# EAGLE board Main Board 2d PCB 2 v38 (EAGLE 9.7.0)
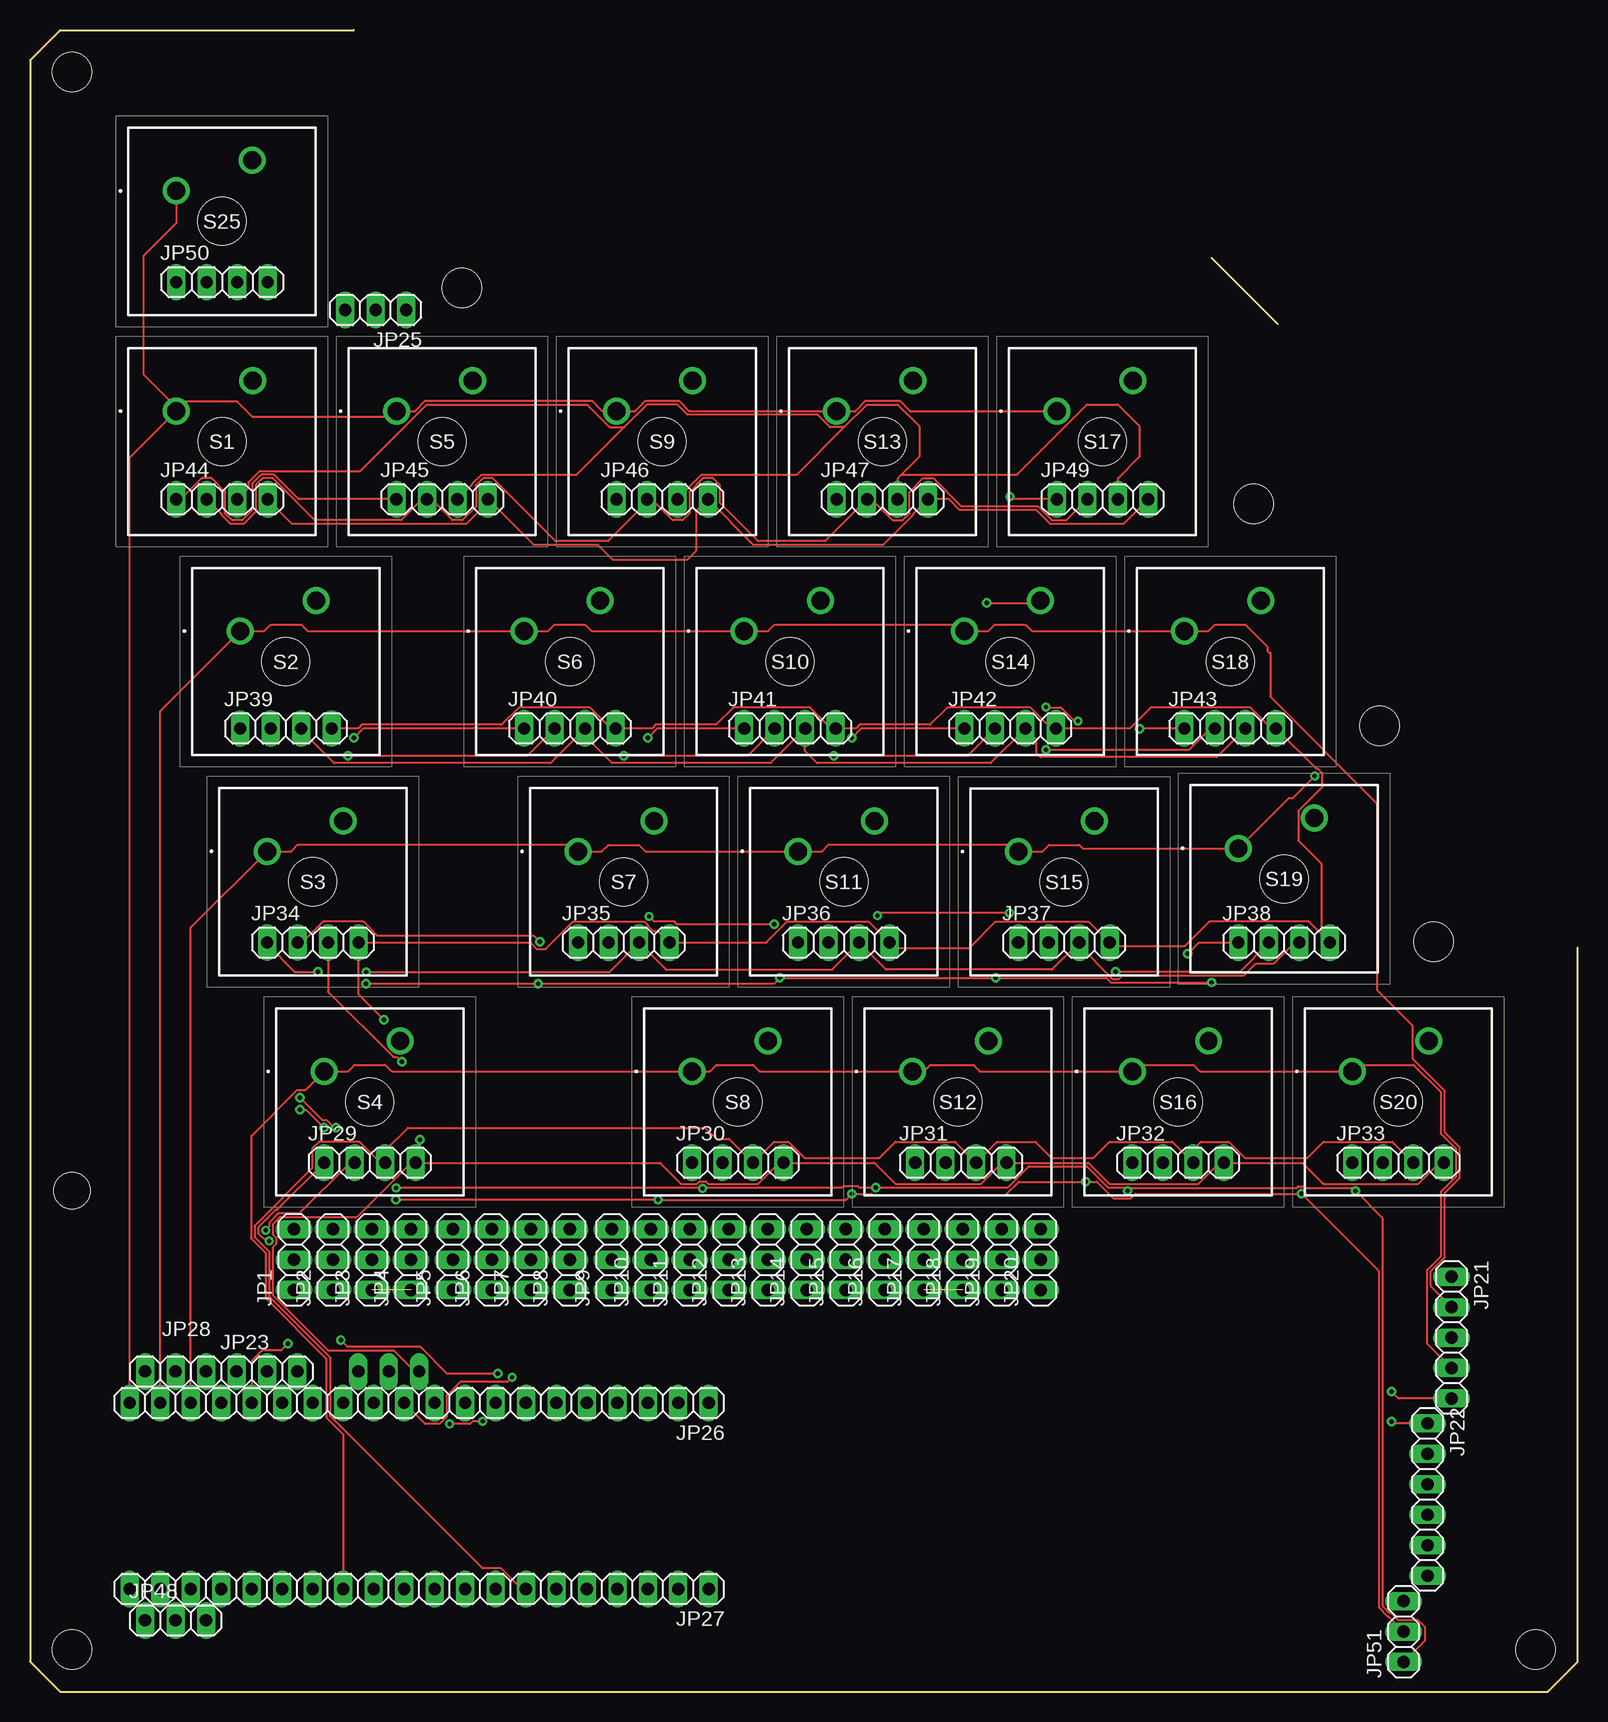
[diagram p0: board, top side]
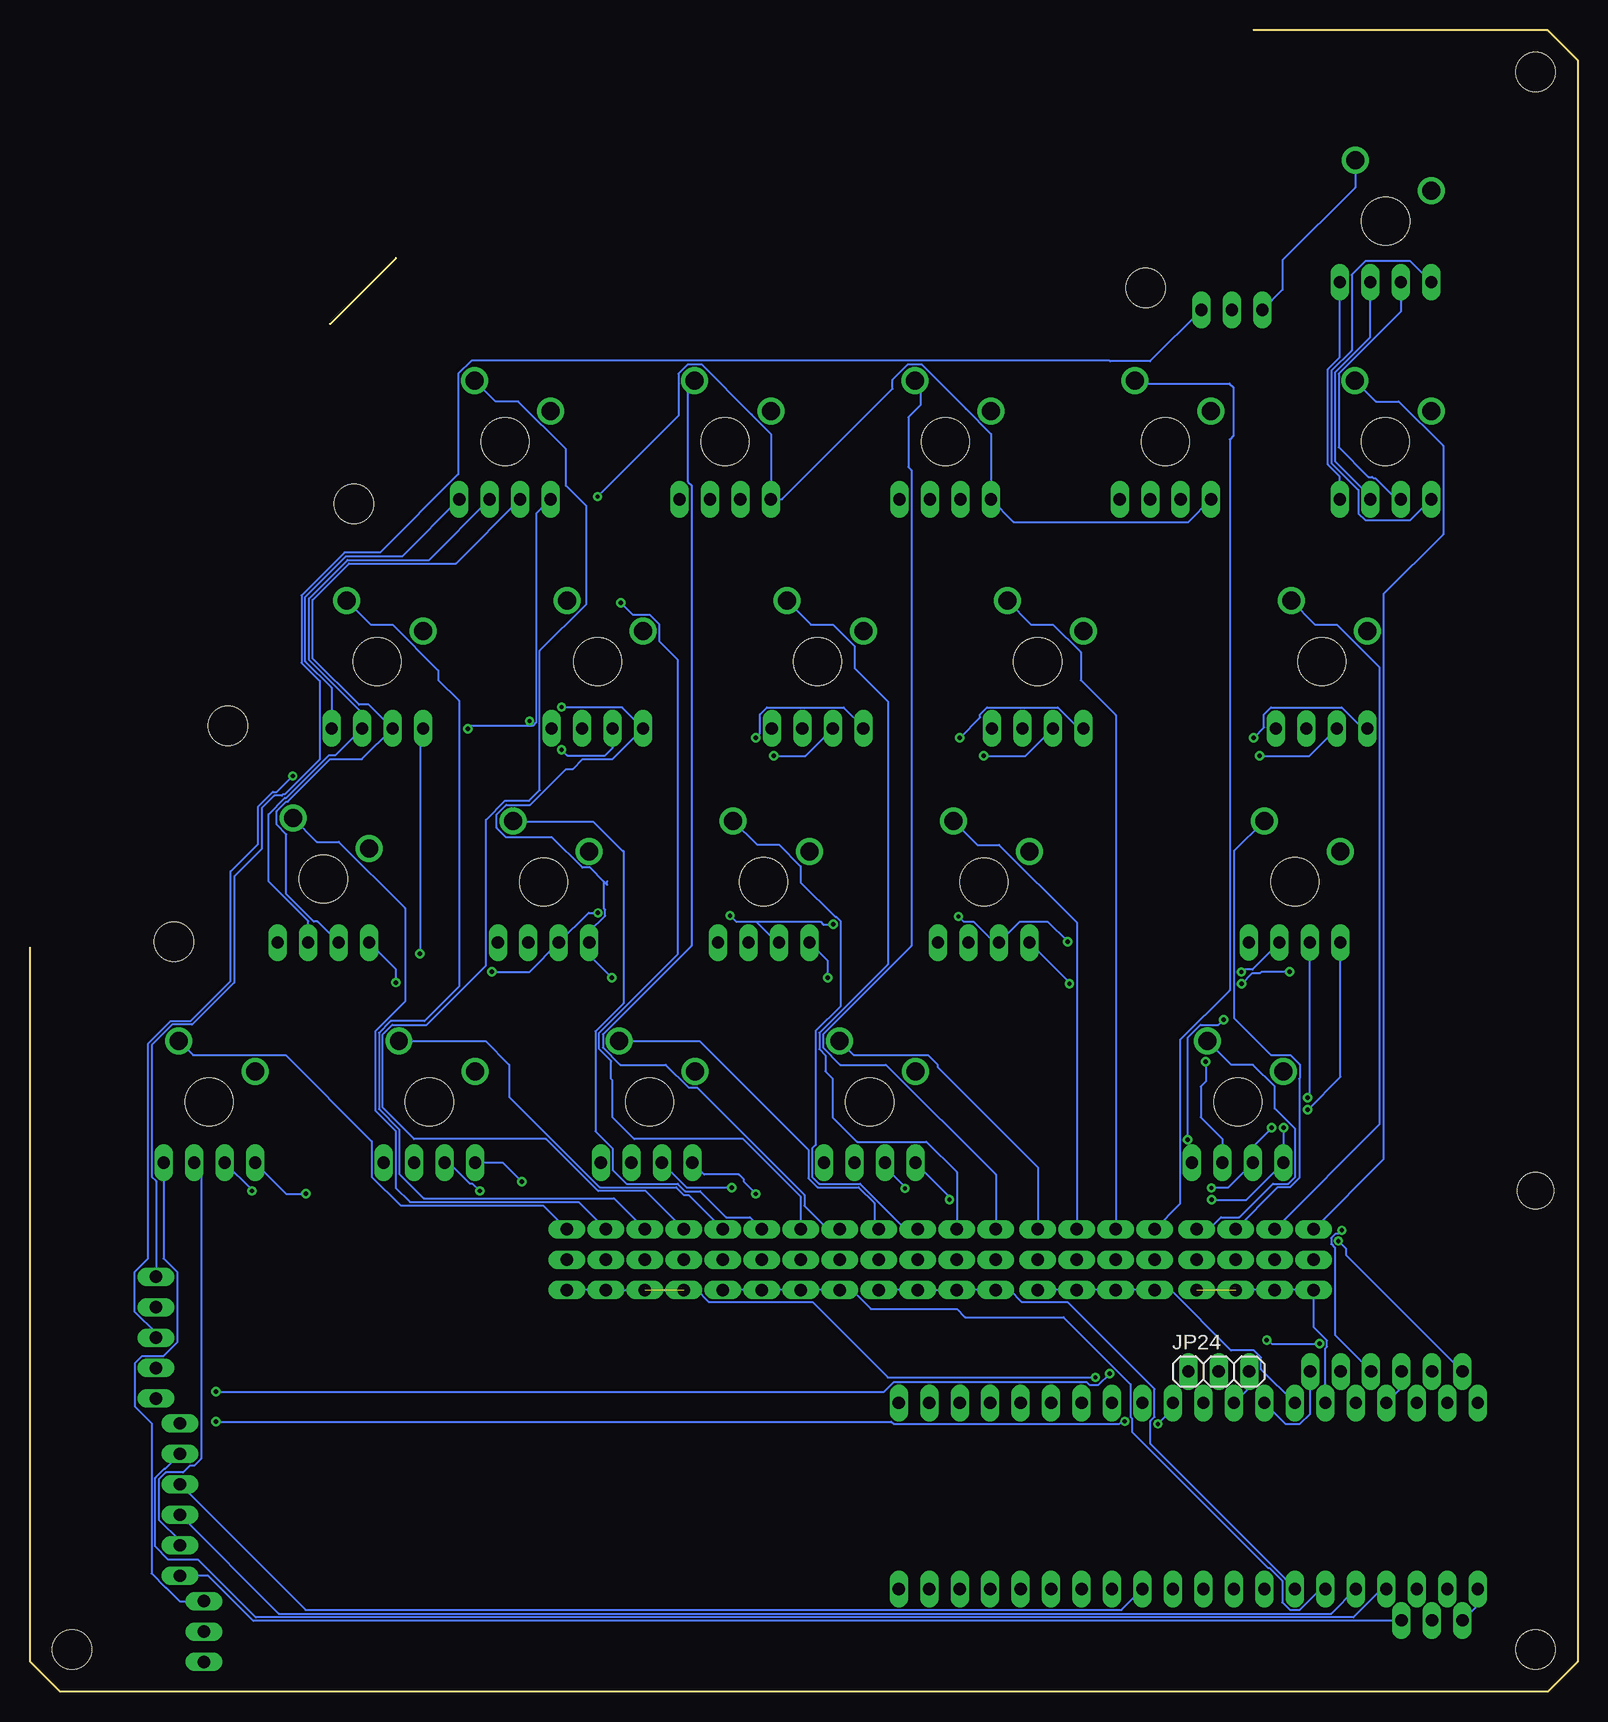
[diagram p1: board, bottom side, seen from below]

Size 129 x 138.5 mm. Coordinates in mm from the lower left corner, seen from the top.
Outline: 27,138.5 2.5,138.5 0,136 0,2.5 2.5,0 126.5,0 129,2.5 129,62
Outline: 98.5,119.5 104,114
Copper layers (1*16): Top / Bottom
Stack-up Default Layer Stack: Top User Defined 0.035mm / Dielectric-1 User Defined 1.5mm / Bottom User Defined 0.035mm
Design rules "default": minimum track width 6mil, minimum drill 0.35mm, track to track 6mil, track to pad 6mil, pad to pad 6mil, via to via 6mil, smd to smd 6mil, copper to edge 40mil, drill to drill 6mil, minimum pad ring 10mil, minimum via ring 8mil, stop-mask expansion 4mil, vias tented up to drill 0mil, thermal gap 10mil
Holes 3.25 mm at 3.5,135 3.5,3.5 125.5,3.5 117,62.5 112.5,80.5 102,99 36,117
Holes 3 mm at 3.5,41.75

## Footprints (pad centres in the part's own frame; a part is rotated, then mirrored left to right if it is on the bottom)
1X03 = drill 1.016 long: 1 -2.54,0; 2 0,0; 3 2.54,0
1X05 = drill 1.016 long: 1 -5.08,0; 2 -2.54,0; 3 0,0; 4 2.54,0; 5 5.08,0
1X06 = drill 1.016 long: 1 -6.35,0; 2 -3.81,0; 3 -1.27,0; 4 1.27,0; 5 3.81,0; 6 6.35,0
1X20 = drill 1.016 long: 1 -24.13,0; 2 -21.59,0; 3 -19.05,0; 4 -16.51,0; 5 -13.97,0; 6 -11.43,0; 7 -8.89,0; 8 -6.35,0; 9 -3.81,0; 10 -1.27,0; 11 1.27,0; 12 3.81,0; 13 6.35,0; 14 8.89,0; 15 11.43,0; 16 13.97,0; 17 16.51,0; 18 19.05,0; 19 21.59,0; 20 24.13,0
1X04 = drill 1.016 long: 1 -3.81,0; 2 -1.27,0; 3 1.27,0; 4 3.81,0
MX1AE1NW = drill 1.499 pad 2.248: 1 0,0; 2 6.35,2.54 | hole 3.988: 3.81,-2.54

## Placement (x,y rotation side)
JP1  PINHD-1X3  [1X03]  22,36 90 top
JP2  PINHD-1X3  [1X03]  25.25,36 90 top
JP3  PINHD-1X3  [1X03]  28.5,36 90 top
JP4  PINHD-1X3  [1X03]  31.75,36 90 top
JP5  PINHD-1X3  [1X03]  35.25,36 90 top
JP6  PINHD-1X3  [1X03]  38.5,36 90 top
JP7  PINHD-1X3  [1X03]  41.75,36 90 top
JP8  PINHD-1X3  [1X03]  45,36 90 top
JP9  PINHD-1X3  [1X03]  48.5,36 90 top
JP10  PINHD-1X3  [1X03]  51.75,36 90 top
JP11  PINHD-1X3  [1X03]  55,36 90 top
JP12  PINHD-1X3  [1X03]  58.25,36 90 top
JP13  PINHD-1X3  [1X03]  61.5,36 90 top
JP14  PINHD-1X3  [1X03]  64.75,36 90 top
JP15  PINHD-1X3  [1X03]  68,36 90 top
JP16  PINHD-1X3  [1X03]  71.25,36 90 top
JP17  PINHD-1X3  [1X03]  74.5,36 90 top
JP18  PINHD-1X3  [1X03]  77.75,36 90 top
JP19  PINHD-1X3  [1X03]  81,36 90 top
JP20  PINHD-1X3  [1X03]  84.25,36 90 top
JP21  PINHD-1X5  [1X05]  118.5,29.5 270 top
JP22  PINHD-1X6  [1X06]  116.5,16 270 top
JP23  PINHD-1X3  [1X03]  19.75,26.67 0 top
JP24  PINHD-1X3  [1X03]  29.91,26.67 0 bottom
JP25  PINHD-1X3  [1X03]  28.81,115.16 180 top
JP26  PINHD-1X20  [1X20]  32.45,24.05 180 top
JP27  PINHD-1X20  [1X20]  32.45,8.55 180 top
JP28  PINHD-1X3  [1X03]  12.13,26.67 0 top
JP29  PINHD-1X4  [1X04]  28.32,44.08 0 top
JP30  PINHD-1X4  [1X04]  59,44.08 0 top
JP31  PINHD-1X4  [1X04]  77.6,44.08 0 top
JP32  PINHD-1X4  [1X04]  95.7,44.08 0 top
JP33  PINHD-1X4  [1X04]  114.05,44.08 0 top
JP34  PINHD-1X4  [1X04]  23.58,62.43 0 top
JP35  PINHD-1X4  [1X04]  49.49,62.42 0 top
JP36  PINHD-1X4  [1X04]  67.84,62.42 0 top
JP37  PINHD-1X4  [1X04]  86.19,62.42 0 top
JP38  PINHD-1X4  [1X04]  104.54,62.42 0 top
JP39  PINHD-1X4  [1X04]  21.33,80.28 0 top
JP40  PINHD-1X4  [1X04]  45,80.28 0 top
JP41  PINHD-1X4  [1X04]  63.35,80.28 0 top
JP42  PINHD-1X4  [1X04]  81.7,80.28 0 top
JP43  PINHD-1X4  [1X04]  100.05,80.28 0 top
JP44  PINHD-1X4  [1X04]  16.01,99.38 0 top
JP45  PINHD-1X4  [1X04]  34.36,99.38 0 top
JP46  PINHD-1X4  [1X04]  52.7,99.38 0 top
JP47  PINHD-1X4  [1X04]  71.06,99.38 0 top
JP48  PINHD-1X3  [1X03]  12.13,5.92 0 top
JP49  PINHD-1X4  [1X04]  89.41,99.38 0 top
JP50  PINHD-1X4  [1X04]  16.01,117.48 0 top
JP51  PINHD-1X3  [1X03]  114.5,5 90 top
S1  MX1A-E1NW  [MX1AE1NW]  12.2,106.74 0 top
S2  MX1A-E1NW  [MX1AE1NW]  17.52,88.38 0 top
S3  MX1A-E1NW  [MX1AE1NW]  19.77,70.04 0 top
S4  MX1A-E1NW  [MX1AE1NW]  24.52,51.69 0 top
S5  MX1A-E1NW  [MX1AE1NW]  30.55,106.74 0 top
S6  MX1A-E1NW  [MX1AE1NW]  41.19,88.39 0 top
S7  MX1A-E1NW  [MX1AE1NW]  45.68,70.03 0 top
S8  MX1A-E1NW  [MX1AE1NW]  55.19,51.69 0 top
S9  MX1A-E1NW  [MX1AE1NW]  48.89,106.74 0 top
S10  MX1A-E1NW  [MX1AE1NW]  59.54,88.39 0 top
S11  MX1A-E1NW  [MX1AE1NW]  64.03,70.04 0 top
S12  MX1A-E1NW  [MX1AE1NW]  73.54,51.69 0 top
S13  MX1A-E1NW  [MX1AE1NW]  67.24,106.74 0 top
S14  MX1A-E1NW  [MX1AE1NW]  77.89,88.38 0 top
S15  MX1A-E1NW  [MX1AE1NW]  82.39,70.02 0 top
S16  MX1A-E1NW  [MX1AE1NW]  91.9,51.69 0 top
S17  MX1A-E1NW  [MX1AE1NW]  85.59,106.74 0 top
S18  MX1A-E1NW  [MX1AE1NW]  96.24,88.38 0 top
S19  MX1A-E1NW  [MX1AE1NW]  100.73,70.28 0 top
S20  MX1A-E1NW  [MX1AE1NW]  110.25,51.7 0 top
S25  MX1A-E1NW  [MX1AE1NW]  12.19,125.09 0 top

## Library data of the parts
JP1-JP51 = Connector; CATEGORY: CONNECTOR; SUB-CATEGORY: PIN-HEADER
S1-S20 S25 = SamacSys_Parts; DESCRIPTION: Pushbutton Switches Full Travel, Mech. Keyswitch, Click Tactile Feel (Blue stem), 60cN, No LED, No Diode, Fixation Pins for PCB Mounting; HEIGHT: 15.2mm; MANUFACTURER_NAME: Cherry; MANUFACTURER_PART_NUMBER: MX1A-E1NW; MOUSER_PART_NUMBER: 540-MX1A-E1NW; MOUSER_PRICE-STOCK: https://www.mouser.co.uk/ProductDetail/CHERRY/MX1A-E1NW/?qs=Z7NFYKyvgJd45Wm4xzFv7w%3D%3D

## Nets
N$1: JP1.3 S1.2
N$2: JP2.3 S2.2
N$3: JP3.3 S3.2
N$4: JP4.3 S4.2
N$5: JP5.3 S5.2
N$6: JP6.3 S6.2
N$7: JP7.3 S7.2
N$8: JP8.3 S8.2
N$9: JP9.3 S9.2
N$10: JP10.3 S10.2
N$11: JP11.3 S11.2
N$12: JP12.3 S12.2
N$13: JP13.3 S13.2
N$14: JP14.3 S14.2
N$15: JP15.3 S15.2
N$16: JP16.3 S16.2
N$17: JP17.3 S17.2
N$18: JP18.3 S18.2
N$19: JP19.3 S19.2
N$20: JP20.3 S20.2
N$21: JP21.1 JP25.1
N$22: JP21.5 JP26.16
N$23: JP22.1 JP26.10
N$24: JP22.6 JP48.3
N$25: JP25.3 S25.2
N$26: JP1.1 JP2.1 JP3.1 JP4.1 JP26.15
N$27: JP5.1 JP6.1 JP7.1 JP8.1 JP26.14
N$28: JP13.1 JP14.1 JP15.1 JP16.1 JP27.15
N$29: JP9.1 JP10.1 JP11.1 JP12.1 JP27.14
N$30: JP17.1 JP18.1 JP19.1 JP20.1 JP26.11
N$31: JP22.2 JP27.17
N$32: JP21.4 JP27.13 S4.1 S8.1 S12.1 S16.1 S20.1
N$33: JP21.3 JP26.18 S3.1 S7.1 S11.1 S15.1 S19.1
N$34: JP21.2 JP26.19 S2.1 S6.1 S10.1 S14.1 S18.1
N$35: JP26.20 S1.1 S5.1 S9.1 S13.1 S17.1 S25.1
N$36: JP22.4 JP27.16
N$37: JP22.3 JP27.9
N$38: JP28.1 JP29.1 JP30.1 JP31.1 JP32.1 JP33.1 JP34.1 JP35.1 JP36.1 JP37.1 JP38.1 JP39.1 JP40.1 JP41.1 JP42.1 JP43.1 JP44.1 JP45.1 JP46.1 JP47.1 JP49.1 JP50.1 JP51.2
N$39: JP26.17 JP28.3
N$40: JP27.20 JP48.1
N$41: JP23.3 JP26.13
N$42: JP24.3 JP26.12
N$43: JP22.5 JP27.7 JP29.3 JP30.3 JP31.3 JP32.3 JP33.3 JP34.3 JP35.3 JP36.3 JP37.3 JP38.3 JP39.3 JP40.3 JP41.3 JP42.3 JP43.3 JP44.3 JP45.3 JP46.3 JP47.3 JP49.3 JP50.3
N$46: JP24.1 JP29.4 JP30.4 JP31.4 JP32.4 JP33.4 JP34.4 JP35.4 JP36.4 JP37.4 JP38.4 JP39.4 JP40.4 JP41.4 JP42.4 JP43.4 JP44.4 JP45.4 JP46.4 JP47.4 JP49.4 JP50.4 JP51.3
N$51: JP23.1 JP29.2 JP30.2 JP31.2 JP32.2 JP33.2 JP34.2 JP35.2 JP36.2 JP37.2 JP38.2 JP39.2 JP40.2 JP41.2 JP42.2 JP43.2 JP44.2 JP45.2 JP46.2 JP47.2 JP49.2 JP50.2 JP51.1

## Tracks (layer width: path | path; a pad name or v marks a point on that pad's centre or on a via)
N$1
  Bottom 0.152: JP1.3 16.17,44.37 16.17,91.5 11.2,96.46 11.2,103.84 14.9,107.54 16.8,107.54 S1.2
N$2
  Bottom 0.152: JP2.3 16.53,47.26 16.53,85.41 20.05,88.93 21.88,88.93 S2.2
N$3
  Bottom 0.152: JP3.3 25.02,42.02 23.98,42.02 23.2,42.81 23.2,51.1 23.16,51.13 23.16,52.25 23.95,53.04 25.54,53.04 28.63,56.13 28.63,69.25 28.63,69.57 28.63,70.07 S3.2
N$4
  Bottom 0.152: S4.2 28.87,52.24 27.05,52.24 25.24,50.43 25.24,48.6 23.52,46.89 23.52,42.91 24.11,42.33 25.39,42.33 28.19,39.53 29.72,39.53 30.71,38.54 JP4.3
N$5
  Bottom 0.152: JP5.3 33.13,40.66 33.13,54.31 29,58.44 29,104.37 28.69,104.68 28.69,108.72 29,109.04 36.65,109.04 S5.2
N$6
  Bottom 0.152: JP6.3 38.5,81.39 41.41,84.3 41.41,86.63 43.72,88.94 45.55,88.94 S6.2
N$7
  Bottom 0.152: S7.2 50.04,70.58 48.21,70.58 41.75,64.12 JP7.3
N$8
  Bottom 0.152: JP8.3 45,43.7 53.34,52.04 53.34,52.25 54.13,53.04 60.35,53.04 S8.2
N$9
  Bottom 0.152: S9.2 54.79,108.83 54.79,107.23 55.79,106.23 55.79,102.06 55.52,101.8 55.52,62.16 62.89,54.79 62.89,53.67 61.46,52.24 57.65,52.24 48.5,43.09 JP9.3
N$10
  Bottom 0.152: JP10.3 51.75,43.3 54.28,45.83 60.05,45.83 62.09,47.87 62.09,51.09 62.7,51.7 62.7,53.04 63.2,53.54 63.2,54.92 57.5,60.61 57.5,82.54 60.26,85.3 60.26,87.13 62.07,88.94 63.9,88.94 S10.2
N$11
  Bottom 0.152: JP11.3 56.02,38.54 59.81,42.33 63.22,42.33 63.8,42.91 63.8,45.25 63.5,45.55 63.5,55.04 61.44,57.11 61.44,64.21 61.79,64.56 61.87,64.56 64.75,67.45 64.75,68.78 66.56,70.59 68.39,70.59 S11.2
N$12
  Bottom 0.152: S12.2 73.17,54.23 64.1,45.16 64.1,42.78 63.35,42.02 59.94,42.02 58.62,40.71 58.62,38.91 JP12.3
N$13
  Bottom 0.152: JP13.3 62.5,38.54 64.44,40.48 64.44,41.38 73.41,50.34 74.1,50.34 76,52.23 79.81,52.23 81.25,53.67 81.25,54.79 73.87,62.16 73.87,100.55 74.14,100.81 74.14,108.73 S13.2
N$14  (via drill 0.35)
  Top 0.152: v79.75,90.75 84.06,90.75 S14.2
  Bottom 0.152: JP14.3 64.75,41.25 69.56,46.06 78.63,46.06 80.44,47.87 80.44,50.94 80.55,51.05 80.55,52.54 81.55,53.54 81.55,54.91 75,61.47 75,86 76.54,87.54 76.54,88.94 77.33,89.74 78.74,89.74 v79.75,90.75
N$15
  Bottom 0.152: 79.54,70.08 79.54,70 | JP15.3 68.99,39.53 70.96,39.53 73.13,41.7 74.38,41.7 75.01,42.33 79.28,42.33 80.42,43.47 80.42,45.25 81.86,46.69 81.86,55.04 79.54,57.36 79.54,70 | 79.54,70 82.04,72.5 88.68,72.5 S15.2
N$16
  Bottom 0.152: S16.2 91.03,54.23 89.05,52.25 89.05,49.55 81.52,42.02 75.14,42.02 74.5,41.39 74.1,41.39 JP16.3
N$17
  Bottom 0.152: JP17.3 77.68,41.72 81.64,41.72 85.98,46.06 96.99,46.06 99.6,48.67 99.6,54.78 98.81,55.58 95.92,55.58 90.99,60.51 90.99,72.65 89.39,74.26 87.39,74.26 86.5,75.14 86.5,86.75 82.6,90.65 82.6,98.8 84.31,100.51 84.31,103.55 88.3,107.54 90.2,107.54 S17.2
N$18
  Bottom 0.152: S18.2 100.6,88.93 98.77,88.93 94.96,85.12 94.96,84.3 93.25,82.58 93.25,58.75 96.12,55.88 98.94,55.88 99.91,54.91 99.91,48.55 98.22,46.85 98.22,43.16 96.17,41.11 80.32,41.11 JP18.3
N$19
  Bottom 0.152: S19.2 105.09,70.83 103.26,70.83 97.74,65.31 97.74,57.51 100.21,55.04 100.21,48.42 98.52,46.73 98.52,41.99 97.33,40.81 83.27,40.81 JP19.3
N$20
  Bottom 0.152: S20.2 115.41,53.05 107.69,53.05 100.5,45.86 100.5,42.91 98.1,40.5 86.21,40.5 JP20.3
N$21
  Bottom 0.152: JP25.1 35.63,110.88 38.95,110.88 39.01,110.94 92.19,110.94 93.29,109.84 93.29,101.47 99.82,94.94 102.78,94.94 106.36,91.36 106.36,85.74 104.85,84.24 104.85,77.69 107.76,74.79 107.89,74.79 108,74.68 108.64,74.68 109.68,73.63 109.68,70.25 111.98,67.95 111.98,59.09 115.48,55.59 117.16,55.59 118.85,53.89 118.85,42.91 118.5,42.56 JP21.1
N$22  (via drill 0.35)
  Top 0.152: JP21.5 114.08,24.42 v113.5,25 | v39,26.5 34.79,26.5 32.56,28.73 26.47,28.73 v25.91,29.29 | v21.5,29 20.93,28.43 19.34,28.43 18.48,27.57 JP26.16
  Bottom 0.152: v113.5,25 57.79,25 56.99,25.8 40.93,25.8 40.7,25.57 39.93,25.57 v39,26.5 | v21.5,29 25.5,29 25.79,29.29 v25.91,29.29
N$23  (via drill 0.35)
  Top 0.152: JP22.1 113.65,22.35 v113.5,22.5 | v37.75,22.51 36.89,22.51 36.67,22.3 35.85,22.3 v34.99,22.3
  Bottom 0.152: v37.75,22.51 37.99,22.51 38.2,22.3 56.99,22.3 57.19,22.5 v113.5,22.5 | v34.99,22.3 33.72,23.57 JP26.10
N$24
  Bottom 0.152: JP22.6 114.15,9.65 110.38,5.88 14.67,5.88 JP48.3
N$25
  Bottom 0.152: S25.2 18.54,125.37 24.59,119.33 24.59,116.84 JP25.3
N$26  (1 unrouted)
  Bottom 0.152: JP4.1 JP2.1 JP1.1 22,30.36 20.89,29.25 20.89,28.75 21.02,28.62 JP26.15
N$27
  Bottom 0.152: JP26.14 26.38,26.87 26.38,27.85 26.96,28.43 28.88,28.43 33.91,33.46 JP5.1 JP6.1 JP7.1 JP8.1
N$28
  Top 0.152: JP13.1 62.21,33.46 62.25,33.5
  Bottom 0.152: JP27.15 21.4,8.55 23.15,6.8 23.97,6.8 24.61,7.44 24.61,9.22 25.69,10.3 25.8,10.3 37.14,21.64 37.14,22.77 37.25,22.88 37.25,25.61 42.84,31.2 51.05,31.2 51.73,31.88 58.91,31.88 60.48,33.46 JP13.1 JP14.1 JP15.1 JP16.1
N$29
  Bottom 0.152: 51.85,33.46 JP9.1 47.31,33.46 46.3,32.45 42.5,32.45 35.27,25.22 35.27,22.88 35.6,22.55 35.6,20.64 24.3,9.35 24.3,9.29 JP27.14 | 51.85,33.46 51.87,33.44 54.98,33.44 JP11.1 JP12.1 | 51.85,33.46 JP10.1
N$30  (via drill 0.35)  (1 unrouted)
  Top 0.152: JP26.11 32.93,22.3 34.13,22.3 34.71,22.88 34.71,24.66 35.85,25.8 39.8,25.8 v40.18,26.18
  Bottom 0.152: JP20.1 JP19.1 80.98,33.44 77.75,33.44 JP18.1 73.41,33.46 72.42,32.47 63.78,32.47 57.49,26.18 v40.18,26.18
N$31
  Bottom 0.152: JP27.17 16.32,8.55 18.68,6.19 110.19,6.19 115,11 117.47,11 118.56,12.08 118.56,17.81 117.8,18.56 117.75,18.56 JP22.2
N$32
  Top 0.152: JP27.13 26.1,21.46 24.7,22.86 24.7,27.74 19.64,32.8 19.64,36.55 18.42,37.76 18.42,46.28 22.25,50.11 22.93,50.11 S4.1 26.5,51.69 27.05,52.24 29.6,52.24 30.15,51.69 S8.1 56.68,51.69 57.22,52.24 60.28,52.24 60.83,51.69 S12.1 74.53,51.69 75.08,52.23 78.63,52.23 79.18,51.69 S16.1 92.39,51.69 92.93,52.23 96.99,52.23 97.52,51.7 S20.1 110.78,52.24 115.33,52.24 117.6,49.97 117.6,46.5 118.85,45.25 118.85,42.91 117.6,41.66 117.6,36.27 116.44,35.12 116.44,29.02 JP21.4
N$33  (via drill 0.35)
  Top 0.152: JP26.18 13.4,63.67 S3.1 21.76,70.04 22.3,70.59 45.13,70.59 S7.1 47.67,70.03 48.21,70.58 50.77,70.58 51.31,70.04 S11.1 66.02,70.04 66.56,70.59 81.82,70.59 S15.1 84.38,70.02 84.92,70.57 87.48,70.57 87.76,70.28 S19.1 104.94,74.5 105.28,74.5 v107.09,76.31
  Bottom 0.152: JP21.3 118.5,29.88 120.25,31.63 120.25,34.99 119.16,36.09 119.16,54.02 117.28,55.89 115.61,55.89 112.28,59.22 112.28,68.36 109.99,70.66 109.99,73.76 108.77,74.98 108.42,74.98 v107.09,76.31
N$34
  Top 0.152: JP26.19 10.86,81.72 S2.1 19.51,88.38 20.05,88.93 22.61,88.93 23.15,88.39 S6.1 43.18,88.39 43.72,88.94 46.28,88.94 46.82,88.39 S10.1 61.53,88.39 62.07,88.94 77.34,88.94 S14.1 79.88,88.38 80.42,88.93 82.98,88.93 83.52,88.38 S18.1 98.23,88.38 98.77,88.93 101.33,88.93 103.14,87.12 103.14,86.75 103.39,86.5 | JP21.2 116.75,33.79 116.75,34.99 117.91,36.15 117.91,41.53 119.16,42.78 119.16,45.38 117.91,46.63 117.91,50.1 115.24,52.76 115.24,55.5 112.28,58.46 112.28,74.02 103.39,82.92 103.39,86.5 | 103.39,86.62 103.39,86.5
N$35
  Top 0.152: JP26.20 8.32,102.86 S1.1 | S1.1 12.99,107.54 17.28,107.54 18.58,106.24 30.05,106.24 S5.1 32.1,106.74 32.95,107.59 46.84,107.59 47.69,106.74 S9.1 50.45,106.74 51.3,107.59 54.1,107.59 54.95,106.74 S13.1 68.8,106.74 69.64,107.59 72.52,107.59 73.37,106.74 S17.1 | S1.1 12.19,107.07 9.45,109.81 9.45,119.65 12.19,122.39 S25.1
N$36
  Bottom 0.152: JP27.16 20.54,6.49 108.26,6.49 JP22.4
N$37
  Bottom 0.152: JP27.9 38.01,6.8 106.03,6.8 JP22.3
N$38  (via drill 0.35)
  Top 0.152: v24.5,47 23,48.5 v22.5,48.5 | v30.5,41 v52.36,41 68,41 68,40.98 v68.5,41.48 70.16,41.48 70.26,41.38 81.31,41.38 82.42,42.5 v88,42.5 88.94,42.5 90.33,41.11 91.75,41.11 92.14,41.5 v106,41.5 112.44,35.06 112.44,7 113.2,6.25 113.25,6.25 JP51.2 | JP34.1 19.77,62.31 22.08,60 v24,60 | v28,59 v42.36,59 62,59 v62.5,59.5 v80.5,59.5 89.71,59.5 90.12,59.09 v98.5,59.09 | v96.5,61.5 97.42,62.42 JP38.1 | JP43.1 92.5,80.28 v92.5,80.25 | JP42.1 69.28,80.28 v68.5,79.5 | JP41.1 52.28,80.28 v51.5,79.5 | JP40.1 27.78,80.28 v27,79.5 | JP29.1 20.57,40.14 20.47,40.14 19.03,38.71 19.03,38.2 19.69,37.55 v19.93,37.55 | JP44.1 12.57,99.38 14.32,101.13 15.14,101.13 16.28,99.99 16.28,98.21 16.87,97.63 17.69,97.63 18.52,98.46 18.52,100.68 19.28,101.44 20.35,101.44 22.41,99.38 JP45.1 | JP49.1 85.56,99.41 81.87,99.41 v81.69,99.6 | v84.69,82.06 84.72,82.03 85.92,82.03 87.07,80.89 v87.36,80.89
  Bottom 0.152: JP28.1 19.3,36.39 19.3,36.92 v19.93,37.55 | v24.5,47 24.5,44.09 JP29.1 27.59,41 v30.5,41 | v22.5,48.5 19.77,51.23 JP34.1 | v68.5,41.48 69.5,42.48 69.5,42.7 69.9,43.1 72.81,43.1 JP31.1 | v88,42.5 89.58,44.08 JP32.1 | JP33.1 107.66,41.5 v106,41.5 | v28,59 27.13,59.87 26.48,59.87 26.35,60 v24,60 | v62.5,59.5 62.5,60.9 JP36.1 | v80.5,59.5 82.38,61.38 JP37.1 82.38,63.34 81.06,64.66 81.06,65.16 81.13,65.24 81.13,67.5 | JP38.1 98.5,60.2 v98.5,59.09 | 80.88,67.52 80.88,67.25 81.13,67.5 | JP43.1 96.5,80.02 v96.5,61.5 | v92.5,80.25 92.25,80.5 87.36,80.5 | 87.36,80.5 87.11,80.5 86.81,80.8 86.81,98.17 JP49.1 | JP41.1 59.54,80.4 61.17,82.03 67.57,82.03 68.15,81.45 68.15,79.85 v68.5,79.5 | JP40.1 41.57,80.28 43.32,82.03 49.22,82.03 49.8,81.45 49.8,81.2 v51.5,79.5 | v27,79.5 26.13,80.37 26.13,81.45 25.55,82.03 19.65,82.03 17.9,80.28 JP39.1 | JP35.1 42.36,59.1 v42.36,59 | JP30.1 52.36,41.25 v52.36,41 | JP50.1 13.95,119.23 17.69,119.23 18.82,118.09 18.82,111.78 20.51,110.09 20.51,102.41 18.27,100.17 18.27,98.21 17.69,97.63 13.95,97.63 JP44.1 | JP45.1 32.42,97.5 47.02,97.5 JP46.1 48.9,104.83 50.99,106.93 50.99,106.94 54.68,110.63 55.8,110.63 57.09,109.34 57.09,108.59 66.3,99.38 JP47.1 67.25,104.83 68.84,106.43 68.84,106.44 73.03,110.63 74.15,110.63 74.94,109.84 74.94,106.34 v81.69,99.6 | 81.13,67.5 82.3,68.67 82.95,68.67 85.49,71.21 89.3,71.21 90.09,72 90.09,73.12 89.3,73.91 87.3,73.91 84.32,76.89 83.75,76.89 82.92,77.72 80.45,77.72 JP42.1 79.64,82.03 84.67,82.03 v84.69,82.06 | v87.36,80.89 87.36,80.5
N$39
  Bottom 0.152: JP26.17 14.67,25.32 JP28.3
N$40
  Bottom 0.152: JP27.20 8.32,7.2 JP48.1
N$41
  Bottom 0.152: JP26.13 24.35,22.3 23.15,22.3 22.29,23.16 JP23.3
N$42
  Bottom 0.152: JP26.12 27.37,25.32 JP24.3
N$43  (via drill 0.35)
  Top 0.152: JP27.7 40.96,8.55 39.21,10.3 37.69,10.3 25,22.99 25,27.87 19.94,32.92 19.94,36.67 18.73,37.89 18.73,38.83 23.52,43.63 23.52,45.25 24.11,45.83 27.46,45.83 29.22,44.08 JP29.3 29.59,45.09 31.5,47 56.29,47 57.22,46.06 58.29,46.06 JP30.3 62.02,45.83 63.22,45.83 64.55,44.5 70.8,44.5 72.13,45.83 77.12,45.83 JP31.3 80.62,45.83 83.82,45.83 85.15,44.5 88.65,44.5 89.98,45.83 95.22,45.83 JP32.3 96.97,45.2 97.6,45.83 99.92,45.83 101.25,44.5 106.5,44.5 107.83,45.83 113.57,45.83 JP33.3 | v31,52.5 30.62,52.88 30.3,52.88 24.85,58.33 JP34.3 | JP39.3 22.6,80.15 25.36,77.39 43.38,77.39 JP40.3 46.27,79.5 46.43,79.5 48.53,77.39 61.73,77.39 JP41.3 64.62,78.38 65.61,77.39 80.08,77.39 JP42.3 83.89,79.36 83.89,78.25 84.25,77.89 98.93,77.89 JP43.3 | v28.02,59.98 48.31,59.98 JP35.3 53.01,60.17 66.86,60.17 JP36.3 71.36,60.17 85.21,60.17 JP37.3 87.46,62.18 90.25,59.39 90.75,59.39 91.05,59.7 101.2,59.7 102.18,60.67 103.68,60.67 105.43,62.42 JP38.3 | JP44.3 18.21,100.32 18.21,100.81 19.15,101.74 27.53,101.74 33.08,107.29 46.43,107.29 48.33,105.39 49.52,105.39 | JP45.3 36.87,100.62 36.87,100.68 37.63,101.44 45.57,101.44 49.52,105.39 | JP46.3 53.98,99.43 55.98,101.44 63.92,101.44 67.87,105.39 | 67.87,105.39 69.77,107.29 72.33,107.29 74.14,105.48 74.14,102.92 72.65,101.44 | JP49.3 90.67,101.11 92.49,102.92 92.49,105.48 90.68,107.29 88.12,107.29 82.27,101.44 72.65,101.44 | 49.52,105.39 51.42,107.29 53.98,107.29 54.83,106.44 65.63,106.44 66.68,105.39 67.87,105.39 | JP47.3 72.33,101.11 72.65,101.44
  Bottom 0.152: JP29.3 29.59,46.06 31.41,47.87 31.41,50.43 31,50.84 v31,52.5 | JP34.3 27.1,60.18 27.82,60.18 v28.02,59.98 | JP22.5 116.5,12.57 118.25,14.32 118.25,17.68 117.67,18.26 116.24,18.26 115.68,18.82 115.33,18.82 114.75,19.4 114.75,43.51 JP33.3 | JP49.3 95.72,94.33 102.53,94.33 105.75,91.11 105.75,86 101.32,81.57 JP43.3 103.57,78.03 104.09,78.03 107.63,74.48 107.77,74.48 109.12,73.12 109.12,67.53 105.81,64.22 JP38.3 | JP50.3 17.27,112.89 20.2,109.97 20.2,102.53 17.27,99.61 JP44.3
N$46  (via drill 0.35)
  Top 0.152: JP24.1 32.07,26.68 30.32,28.43 24.87,28.43 20.25,33.05 20.25,37.01 20.54,37.3 20.54,37.8 20.25,38.09 20.25,38.95 20.83,39.53 27.21,39.53 31.76,44.08 JP29.4 | JP29.4 32.5,44.45 v32.5,46 | v29.5,56 27.39,58.11 JP34.4 41.71,62.43 42.25,61.89 42.98,61.89 45.27,64.18 51.17,64.18 51.95,63.39 52.33,63.39 JP35.4 61.37,62.42 63.12,64.18 69.9,64.18 JP36.4 72.08,62 78.29,62 80.47,64.18 88.25,64.18 JP37.4 90.32,62.11 96.25,62.11 98.32,64.18 106.6,64.18 JP38.4 107.63,63.15 107.63,69.02 105.73,70.92 105.73,73.38 107.7,75.35 107.7,76.56 107.34,76.92 107.22,76.92 JP43.4 103.48,80.28 101.73,82.03 93.42,82.03 91.67,80.28 JP42.4 85.13,80.28 83.38,82.03 76.48,82.03 75.03,80.59 69.15,80.59 68.85,80.28 JP41.4 66.78,80.28 65.03,82.03 58.63,82.03 57.18,80.59 52.15,80.59 51.85,80.28 JP40.4 48.43,80.28 46.68,82.03 40.78,82.03 39.33,80.59 27.65,80.59 27.34,80.28 JP39.4 | JP29.4 52.53,44.08 54.28,42.33 55.6,42.33 55.81,42.54 56.32,42.54 56.53,42.33 60.68,42.33 62.43,44.08 JP30.4 70.38,44.08 72.13,42.33 79.28,42.33 81.03,44.08 JP31.4 88.23,44.08 89.98,42.33 97.38,42.33 99.13,44.08 JP32.4 106.08,44.08 107.83,42.33 115.73,42.33 117.48,44.08 JP33.4 | 42,95.57 41.97,95.57 | 42,95.57 38.19,99.38 JP45.4 38.16,99.13 36.36,97.32 21.87,97.32 JP44.4 | 42,95.57 47.36,95.57 48.61,94.32 54.76,94.32 55.52,95.08 55.52,98.39 JP46.4 60.32,95.57 71.11,95.57 73.62,98.08 73.62,98.14 JP47.4 76.61,99.38 77.5,98.5 83.88,98.5 85.06,97.32 91.16,97.32 JP49.4
  Bottom 0.152: v29.5,56 29.92,55.58 31.43,55.58 32.5,54.51 v32.5,46 | JP44.4 19.82,101.28 20.81,102.28 20.81,110.22 19.82,111.22 JP50.4 | JP51.3 116.54,7.54 117.66,8.66 117.67,8.66 118.86,9.85 118.86,22.37 120.25,23.76 120.25,27.37 119.67,27.95 117.89,27.95 116.75,29.09 116.75,34.99 117.86,36.1 JP33.4 | JP43.4 103.86,83.68 106.05,85.87 106.05,91.24 102.65,94.64 97.96,94.64 JP49.4
N$51  (via drill 0.35)
  Top 0.152: JP29.2 26.68,44.08 22.43,39.84 20.7,39.84 19.94,39.08 19.94,38.76 v19.64,38.45 | v30.52,41.98 55.98,41.98 56,42 | 91.5,42 91.48,42.02 89.85,42.02 88.1,43.77 83.27,43.77 81.52,42.02 70.52,42.02 v70.5,42 69.14,42 69.03,42.11 67.77,42.11 67.66,42 56,42 | 91.5,42 105.64,42 105.75,42.11 106.25,42.11 106.36,42 110.22,42 v110.5,41.72 112.75,39.47 112.75,7.13 113.33,6.55 113.45,6.55 114.01,5.99 115.67,5.99 116.25,5.41 116.25,4.21 JP51.1 | JP38.2 100.84,60 v90.5,60 | JP42.2 78.15,78 v67,78 | JP41.2 59.8,78 v49.5,78 | JP40.2 41.45,78 v26.5,78 | JP44.2 15.98,98.14 15.98,98.08 16.74,97.32 17.81,97.32 18.82,98.33 18.82,100.55 19.41,101.13 20.23,101.13 23.73,97.63 30.95,97.63 32.71,99.38 JP45.2 33.46,99.38 35.22,97.63 36.03,97.63 37.17,98.77 37.17,100.55 37.76,101.13 38.58,101.13 43.83,95.88 48.18,95.88 51.44,99.13 JP46.2 51.81,99.38 53.56,97.63 54.38,97.63 54.97,98.21 54.97,99.99 56.1,101.13 56.92,101.13 57.51,100.55 57.51,99.07 60.7,95.88 66.28,95.88 JP47.2 70.16,99.38 71.92,97.63 72.73,97.63 73.32,98.21 73.32,99.99 74.45,101.13 75.29,101.13 77.62,98.81 84.01,98.81 85.19,97.63 86.38,97.63 JP49.2 | v42.5,62.5 42,63 28.98,63 27.8,64.18 24.44,64.18 22.69,62.43 JP34.2 | JP43.2 98.4,80.28 96.62,78.5 v84.7,78.5 | v62.04,63.96 53.93,63.96 53.71,64.18 52.03,64.18 v51.6,64.6 | v81.66,64.91 70.88,64.91 v70.64,64.67 | v25.5,47 25.36,47 24.75,47.61 24.39,47.61 v22.5,49.5 | 56,42 v56.07,41.93 | 91.5,42 v91.5,41.72
  Bottom 0.152: v25.5,47 27,45.5 27,44.14 JP29.2 29.14,42 30.5,42 v30.52,41.98 | v22.5,49.5 22.31,49.69 JP34.2 | JP30.2 57.73,43.73 56.07,42.07 v56.07,41.93 | v110.5,41.72 110.5,41.8 JP33.2 | v90.5,60 87.34,60 JP37.2 82.43,64.91 v81.66,64.91 | JP42.2 80.43,78.66 81.06,78.03 84.23,78.03 v84.7,78.5 | v67,78 64.36,78 JP41.2 | v49.5,78 46.01,78 JP40.2 | v26.5,78 22.34,78 JP39.2 | JP49.2 93.49,94.03 102.4,94.03 105.44,90.98 105.44,86.12 101.58,82.26 100.76,82.26 JP43.2 101.34,77.72 103.96,77.72 107.5,74.18 107.64,74.18 108.43,73.38 108.43,72.27 107.63,71.46 107.63,66.47 105.34,64.18 105.02,64.18 JP38.2 | v70.5,42 74.25,42 JP31.2 | JP23.1 17.21,26.71 20.21,29.71 20.21,36.97 20.54,37.3 20.54,37.8 20.18,38.15 19.94,38.15 v19.64,38.45 | JP44.2 15.11,99.38 16.87,101.13 17,101.13 17.12,101.25 17.42,101.25 19.9,103.73 19.9,109.84 14.73,115 JP50.2 | v51.6,64.6 51.18,64.18 50.35,64.18 48.6,62.42 JP35.2 46.47,64.18 44.18,64.18 v42.5,62.5 | v62.04,63.96 62.9,63.96 63.12,64.18 68.5,64.18 | v70.64,64.67 70.14,64.18 68.5,64.18 | 68.5,64.18 66.75,62.42 JP36.2 | v91.5,41.72 92.11,42.33 92.3,42.33 94.05,44.08 JP32.2